# Altium PCB Soil_moisture.PcbDoc
Units mm, origin at the board's own origin, x right, y up, seen from the top; angles counter-clockwise.
Board outline 98 x 100 mm, 2 copper layers (Top Layer, Bottom Layer); 70 components, 10 nets, 185 pads, 240 vias.
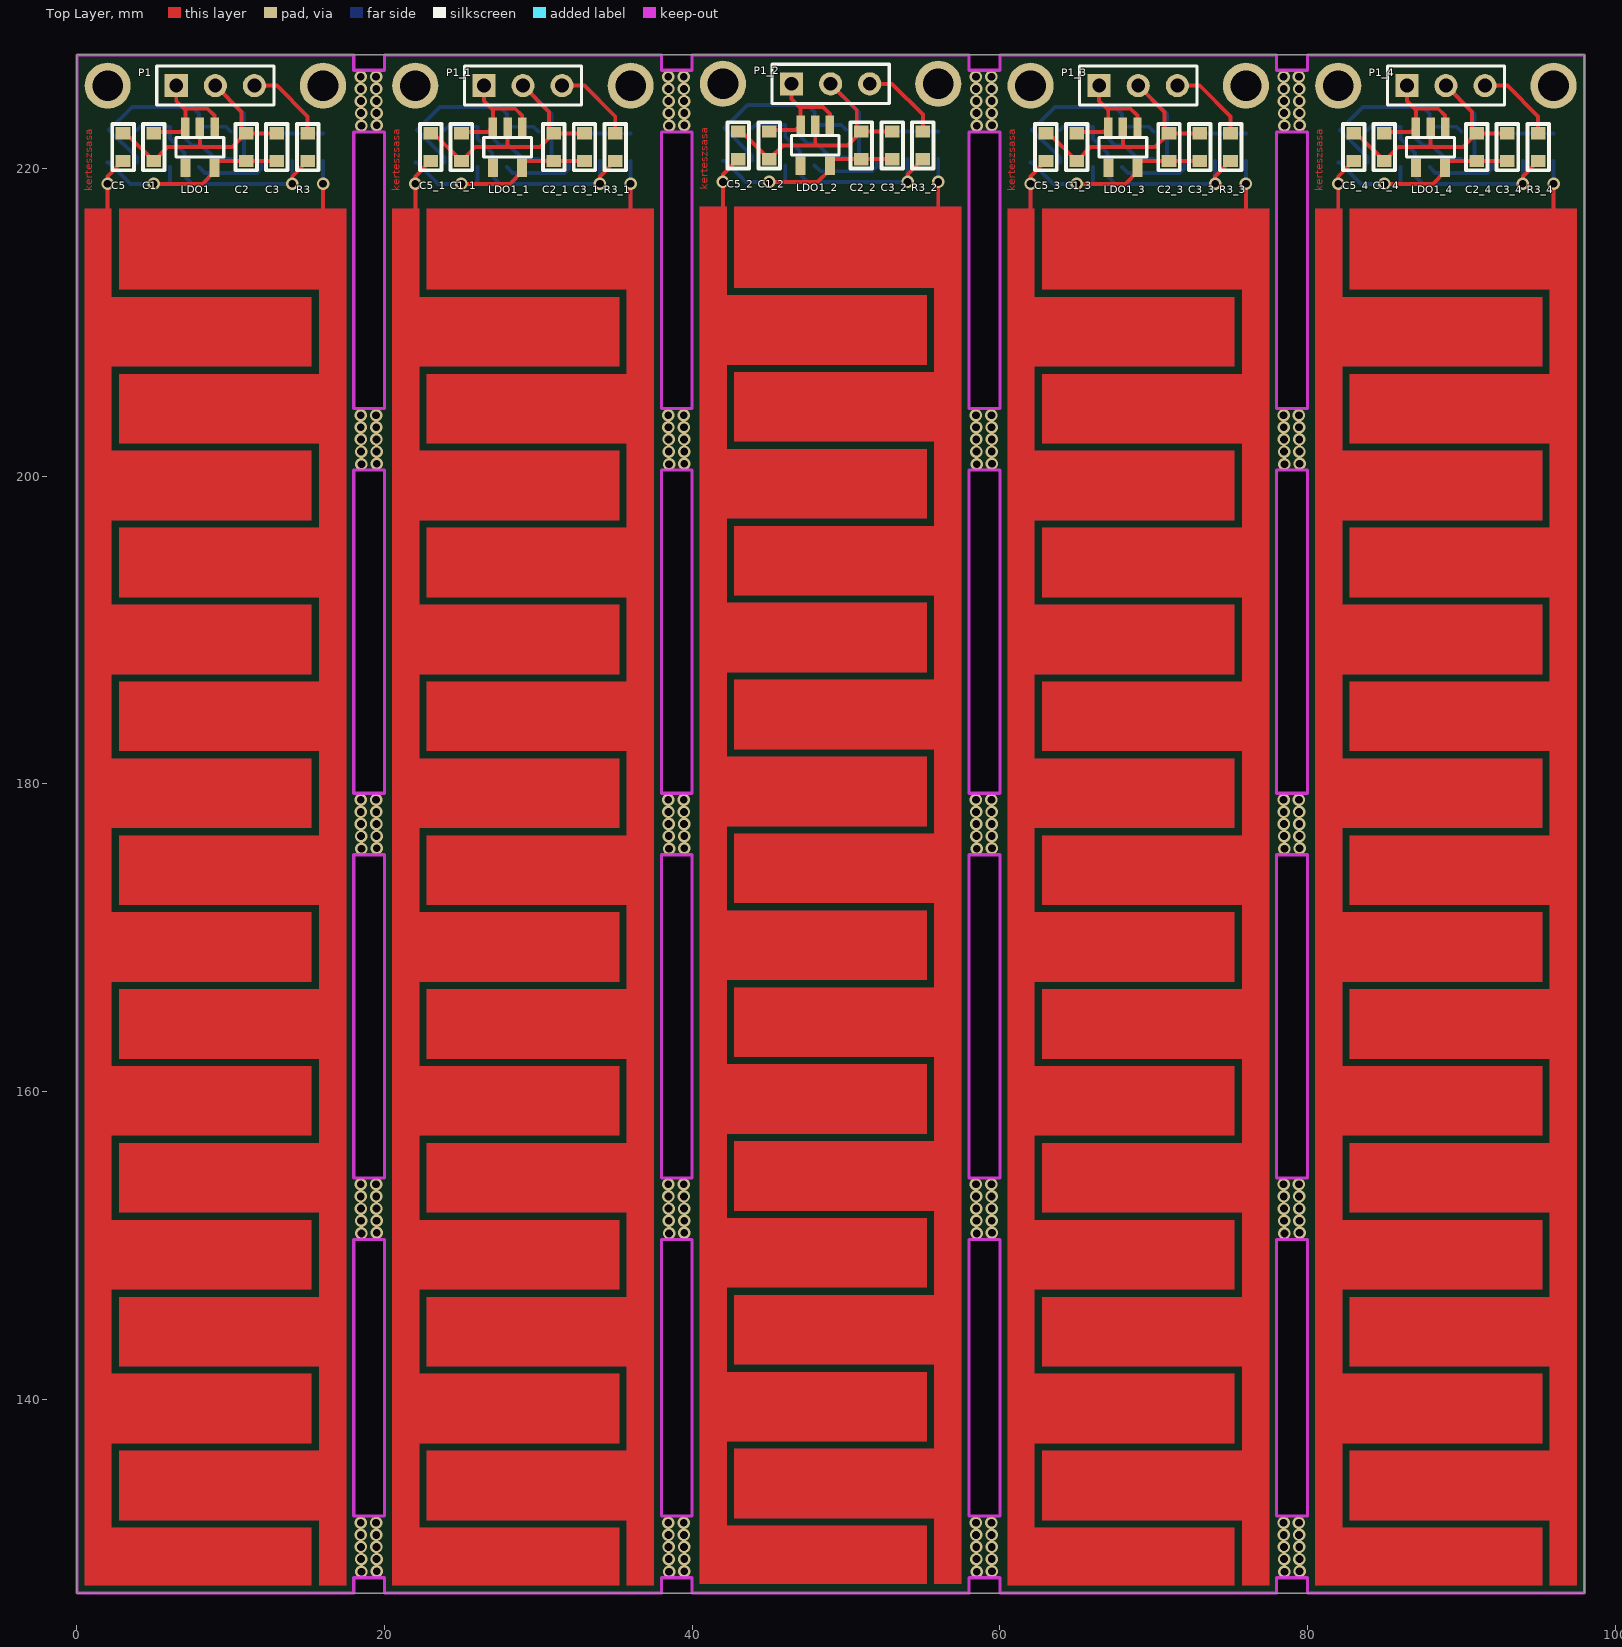
[diagram p0: Top Layer view]
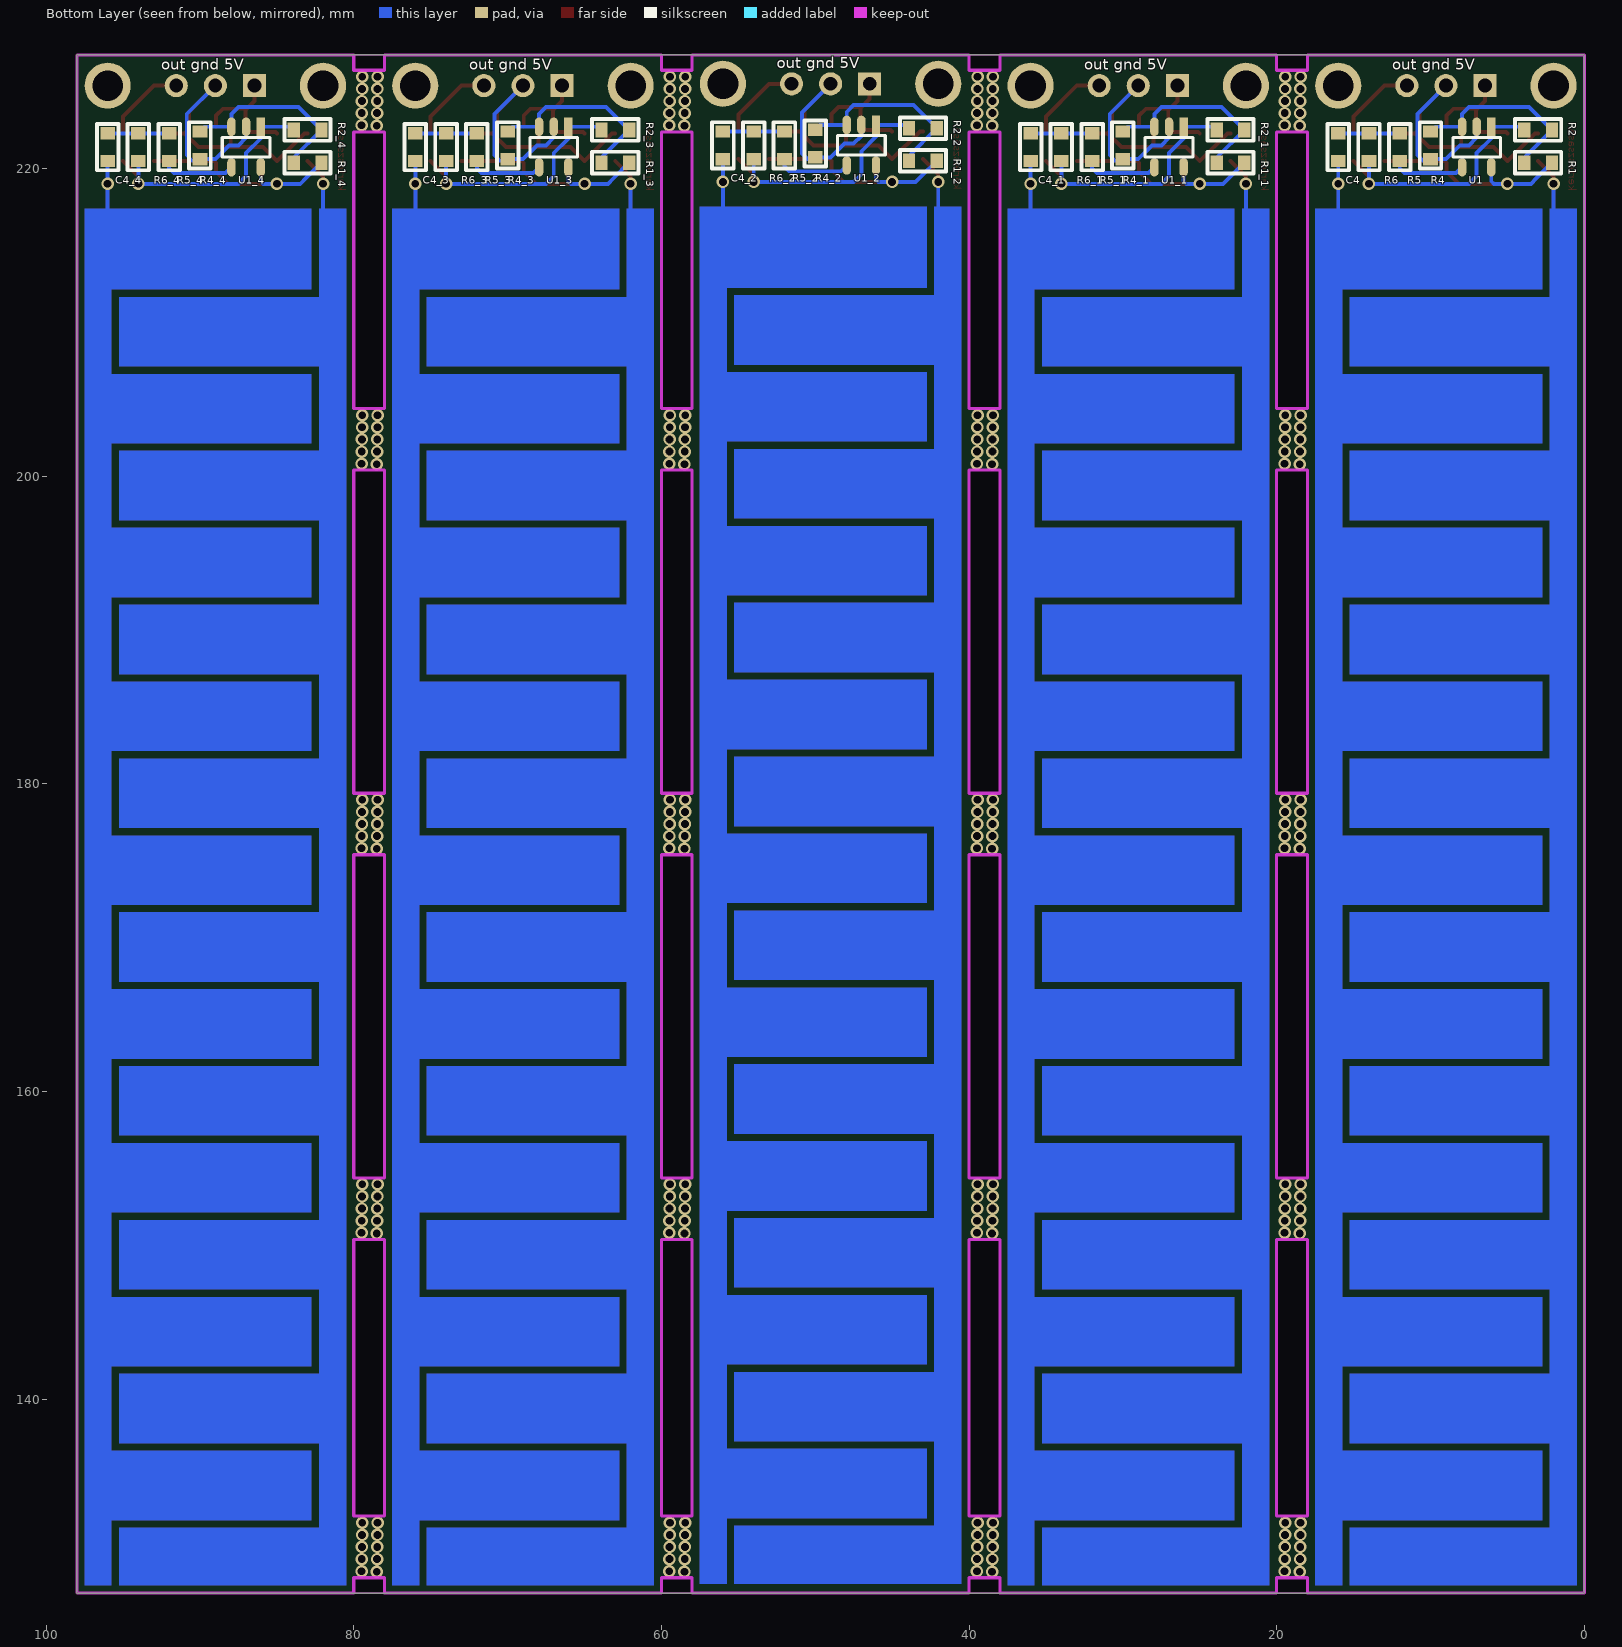
[diagram p1: Bottom Layer view, seen from below]
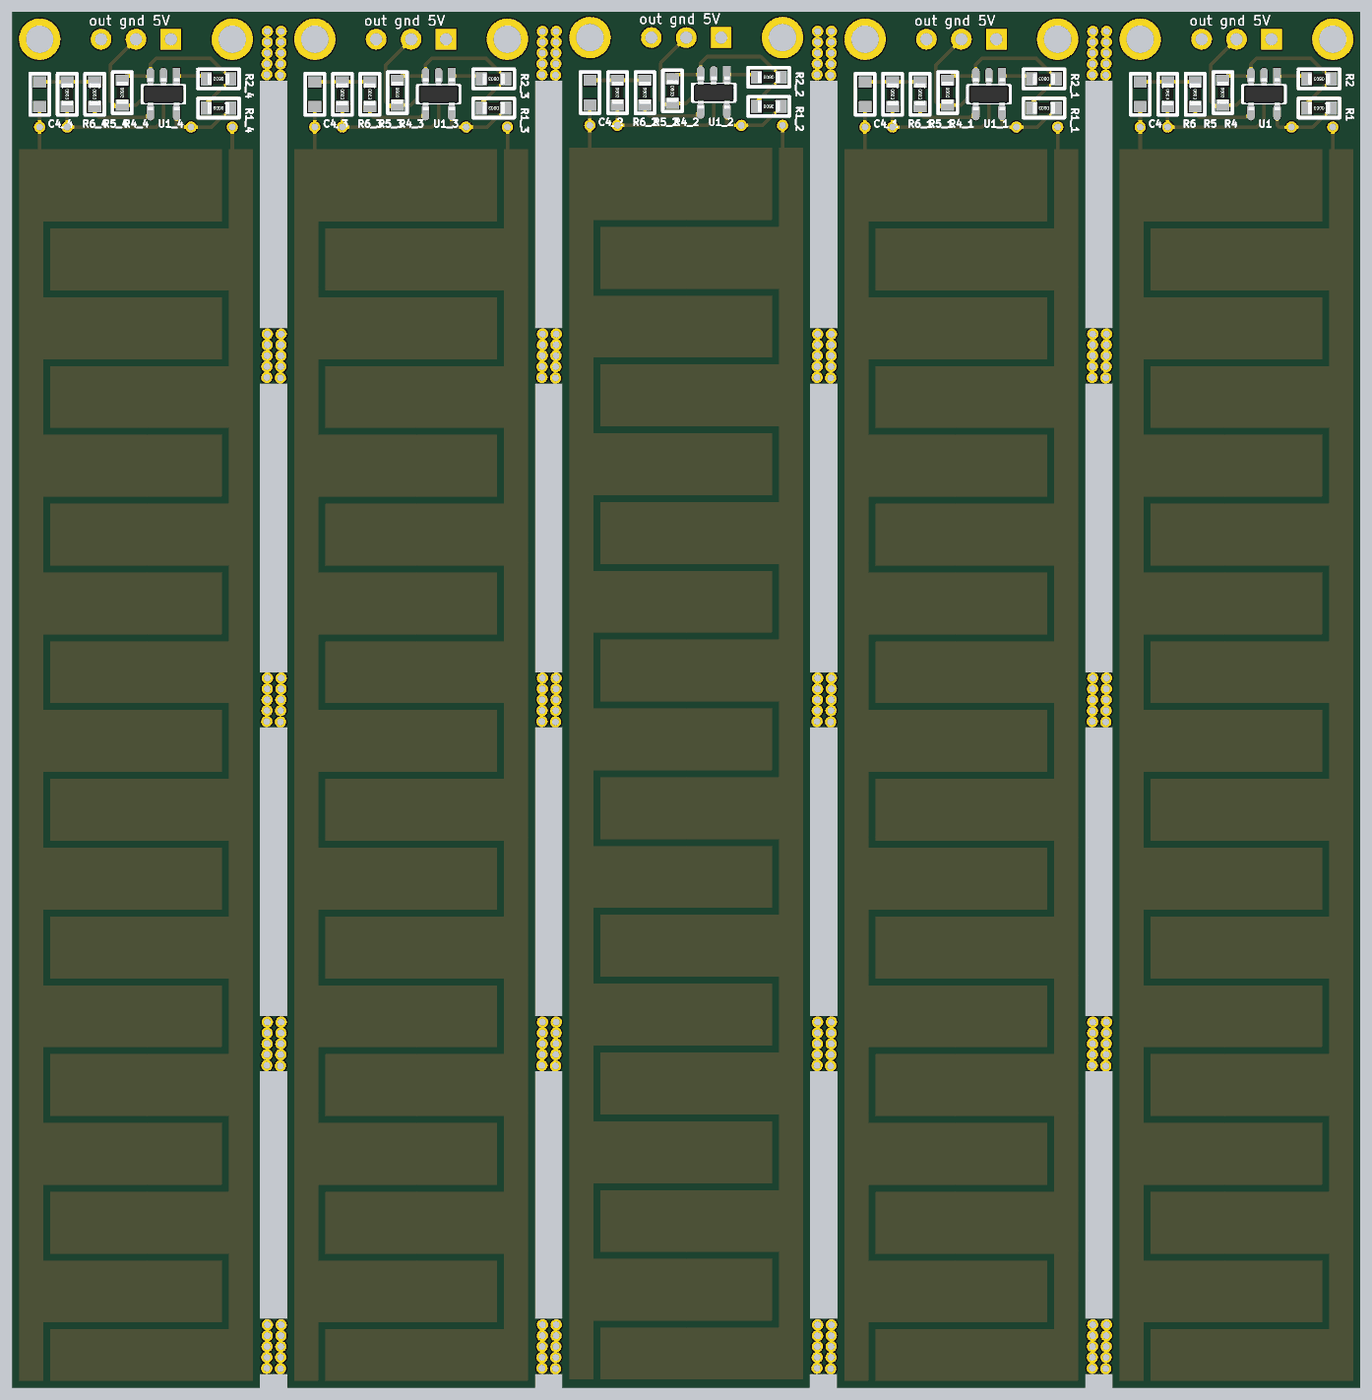
[diagram p2: 3D render of the assembled board from below, using the file's embedded part models]

## Layer stack, top to bottom
Top Layer: signal copper 0.0356
Dielectric: dielectric 0.32, FR-4, Dk 4.8
Bottom Layer: signal copper 0.0356

## Board outline
98,227.381 98,127.381 0,127.381 0,227.381
cut-out: 18,132.381 20,132.381 20,150.381 18,150.381
cut-out: 38,132.381 40,132.381 40,150.381 38,150.381
cut-out: 58,132.381 60,132.381 60,150.381 58,150.381
cut-out: 78,132.381 80,132.381 80,150.381 78,150.381
cut-out: 78,154.381 80,154.381 80,175.381 78,175.381
cut-out: 78,204.381 80,204.381 80,222.381 78,222.381
cut-out: 58,204.381 60,204.381 60,222.381 58,222.381
cut-out: 38,204.381 40,204.381 40,222.381 38,222.381
cut-out: 18,204.381 20,204.381 20,222.381 18,222.381
cut-out: 58,154.381 60,154.381 60,175.381 58,175.381
cut-out: 38,154.381 40,154.381 40,175.381 38,175.381
cut-out: 18,154.381 20,154.381 20,175.381 18,175.381
cut-out: 18,179.381 20,179.381 20,200.381 18,200.381
cut-out: 38,179.381 40,179.381 40,200.381 38,200.381
cut-out: 58,179.381 60,179.381 60,200.381 58,200.381
cut-out: 78,179.381 80,179.381 80,200.381 78,200.381
cut-out: 18,127.381 20,127.381 20,128.381 18,128.381
cut-out: 38.024,127.381 40.024,127.381 40.024,128.381 38.024,128.381
cut-out: 58,127.381 60,127.381 60,128.381 58,128.381
cut-out: 78,127.381 80,127.381 80,128.381 78,128.381
cut-out: 18,226.381 20,226.381 20,227.381 18,227.381
cut-out: 38,226.381 40,226.381 40,227.381 38,227.381
cut-out: 58,226.381 60,226.381 60,227.381 58,227.381
cut-out: 78,226.381 80,226.381 80,227.381 78,227.381

## Design rules (kind name [scope] priority, off if disabled: settings)
Clearance [All] p1: gap=0.254
PolygonConnect [All] p1: connectstyle=Relief reliefconductorwidth=0.254 reliefentries=4 polygonreliefangle="90 Angle"
RoutingVias [All] p1: holewidth=0.711 width=1.27 viastyle="Through Hole" minholewidth=0.508 minwidth=0.813 maxholewidth=0.711 maxwidth=1.27
SilkscreenOverComponentPads [All] p1: minsilkscreentomaskgap=0.254
SolderMaskExpansion [All] p1: expansion=0.102
Width [All] p1: maxlimit=0.254 minlimit=0.254 preferedwidth=0.254
27 further rules are at their usual default settings.

## Classes and differential pairs
component class Soil_moisture: C1 C2 C3 C4 C5 LDO1 P1 R1 R2 R3 R4 R5 R6 U1

## Components (designator, comment, footprint, x,y, rotation, side; value= is the part's Value field where it differs from the comment)
C1 "4.7uF" FP_0603_CAP_080 5,221.381 r90 top
C1_1 "4.7uF" FP_0603_CAP_080 25,221.381 r90 top (schematic designator C1)
C1_2 "4.7uF" FP_0603_CAP_080 45,221.5 r90 top (schematic designator C1)
C1_3 "4.7uF" FP_0603_CAP_080 65,221.381 r90 top (schematic designator C1)
C1_4 "4.7uF" FP_0603_CAP_080 85,221.381 r90 top (schematic designator C1)
C2 "100nF" FP_0603_CAP_080 11,221.381 r270 top
C2_1 "100nF" FP_0603_CAP_080 31,221.381 r270 top (schematic designator C2)
C2_2 "100nF" FP_0603_CAP_080 51,221.5 r270 top (schematic designator C2)
C2_3 "100nF" FP_0603_CAP_080 71,221.381 r270 top (schematic designator C2)
C2_4 "100nF" FP_0603_CAP_080 91,221.381 r270 top (schematic designator C2)
C3 "4.7uF" FP_0603_CAP_080 13,221.381 r270 top
C3_1 "4.7uF" FP_0603_CAP_080 33,221.381 r270 top (schematic designator C3)
C3_2 "4.7uF" FP_0603_CAP_080 53,221.5 r270 top (schematic designator C3)
C3_3 "4.7uF" FP_0603_CAP_080 73,221.381 r270 top (schematic designator C3)
C3_4 "4.7uF" FP_0603_CAP_080 93,221.381 r270 top (schematic designator C3)
C4 "100nF" FP_0603_CAP_080 16,221.381 r90 bottom
C4_1 "100nF" FP_0603_CAP_080 36,221.381 r90 bottom (schematic designator C4)
C4_2 "100nF" FP_0603_CAP_080 56,221.5 r90 bottom (schematic designator C4)
C4_3 "100nF" FP_0603_CAP_080 76,221.381 r90 bottom (schematic designator C4)
C4_4 "100nF" FP_0603_CAP_080 96,221.381 r90 bottom (schematic designator C4)
C5 "100nF" FP_0603_CAP_080 3,221.381 r90 top
C5_1 "100nF" FP_0603_CAP_080 23,221.381 r90 top (schematic designator C5)
C5_2 "100nF" FP_0603_CAP_080 43,221.5 r90 top (schematic designator C5)
C5_3 "100nF" FP_0603_CAP_080 63,221.381 r90 top (schematic designator C5)
C5_4 "100nF" FP_0603_CAP_080 83,221.381 r90 top (schematic designator C5)
LDO1 "LP2980AIM5-3.3" SUPPLY_SOT23-5 8,221.381 r270 top
LDO1_1 "LP2980AIM5-3.3" SUPPLY_SOT23-5 28,221.381 r270 top (schematic designator LDO1)
LDO1_2 "LP2980AIM5-3.3" SUPPLY_SOT23-5 48,221.5 r270 top (schematic designator LDO1)
LDO1_3 "LP2980AIM5-3.3" SUPPLY_SOT23-5 68,221.381 r270 top (schematic designator LDO1)
LDO1_4 "LP2980AIM5-3.3" SUPPLY_SOT23-5 88,221.381 r270 top (schematic designator LDO1)
P1 "Header 3" HDR1X3 6.46,225.381 r0 top
P1_1 "Header 3" HDR1X3 26.46,225.381 r0 top (schematic designator P1)
P1_2 "Header 3" HDR1X3 46.46,225.5 r0 top (schematic designator P1)
P1_3 "Header 3" HDR1X3 66.46,225.381 r0 top (schematic designator P1)
P1_4 "Header 3" HDR1X3 86.46,225.381 r0 top (schematic designator P1)
R1 "75K" FP_0603_RES 3,220.381 r0 bottom
R1_1 "75K" FP_0603_RES 23,220.381 r0 bottom (schematic designator R1)
R1_2 "75K" FP_0603_RES 43,220.5 r0 bottom (schematic designator R1)
R1_3 "75K" FP_0603_RES 63,220.381 r0 bottom (schematic designator R1)
R1_4 "75K" FP_0603_RES 83,220.381 r0 bottom (schematic designator R1)
R2 "220K" FP_0603_RES 3,222.5 r0 bottom
R2_1 "220K" FP_0603_RES 23,222.5 r0 bottom (schematic designator R2)
R2_2 "220K" FP_0603_RES 43,222.619 r0 bottom (schematic designator R2)
R2_3 "220K" FP_0603_RES 63,222.5 r0 bottom (schematic designator R2)
R2_4 "220K" FP_0603_RES 83,222.5 r0 bottom (schematic designator R2)
R3 "1K" FP_0603_RES 15,221.381 r90 top
R3_1 "1K" FP_0603_RES 35,221.381 r90 top (schematic designator R3)
R3_2 "1K" FP_0603_RES 55,221.5 r90 top (schematic designator R3)
R3_3 "1K" FP_0603_RES 75,221.381 r90 top (schematic designator R3)
R3_4 "1K" FP_0603_RES 95,221.381 r90 top (schematic designator R3)
R4 "75K" FP_0603_RES 10,221.5 r270 bottom
R4_1 "75K" FP_0603_RES 30,221.5 r270 bottom (schematic designator R4)
R4_2 "75K" FP_0603_RES 50,221.619 r270 bottom (schematic designator R4)
R4_3 "75K" FP_0603_RES 70,221.5 r270 bottom (schematic designator R4)
R4_4 "75K" FP_0603_RES 90,221.5 r270 bottom (schematic designator R4)
R5 "1K" FP_0603_RES 12,221.381 r270 bottom
R5_1 "1K" FP_0603_RES 32,221.381 r270 bottom (schematic designator R5)
R5_2 "1K" FP_0603_RES 52,221.5 r270 bottom (schematic designator R5)
R5_3 "1K" FP_0603_RES 72,221.381 r270 bottom (schematic designator R5)
R5_4 "1K" FP_0603_RES 92,221.381 r270 bottom (schematic designator R5)
R6 "75K" FP_0603_RES 14,221.381 r270 bottom
R6_1 "75K" FP_0603_RES 34,221.381 r270 bottom (schematic designator R6)
R6_2 "75K" FP_0603_RES 54,221.5 r270 bottom (schematic designator R6)
R6_3 "75K" FP_0603_RES 74,221.381 r270 bottom (schematic designator R6)
R6_4 "75K" FP_0603_RES 94,221.381 r270 bottom (schematic designator R6)
U1 "MCP6001" ANALOG_SOT23-5 7,221.381 r270 bottom
U1_1 "MCP6001" ANALOG_SOT23-5 27,221.381 r270 bottom (schematic designator U1)
U1_2 "MCP6001" ANALOG_SOT23-5 47,221.5 r270 bottom (schematic designator U1)
U1_3 "MCP6001" ANALOG_SOT23-5 67,221.381 r270 bottom (schematic designator U1)
U1_4 "MCP6001" ANALOG_SOT23-5 87,221.381 r270 bottom (schematic designator U1)

## Footprints (in the part's own frame and the unit in brackets; to place one, negate y for a bottom-side part, rotate by r counter-clockwise, add the part's x,y. Pads: shape width x height; smd on the part's side, far side on the other; paste and mask are expansions set on the pad)
ANALOG_SOT23-5 [mm] "SOT23, 5-Leads, Body 2.9x1.6mm, Pitch 0.95mm, Lead Span 2.8mm, IPC Medium Density"
  rect 1.2x0.55 smd mask+0.05: 1(-1.327,0.95)
  oval 1.2x0.55 smd mask+0.05: 2(-1.327,0) 3(-1.327,-0.95) 4(1.3,-0.95) 5(1.3,0.95)
  silkscreen extent -0.64,-1.55 0.64,1.55, body extent -1.17,-1.46 1.17,1.46, height 1
FP_0603_CAP_080 [mm] "0.8mm magas 0603 kapacitás"
  rect 0.8x0.95 smd: 1(-0.9,0) 2(0.9,0)
  silkscreen extent -1.5,-0.7 1.5,0.7, body extent -0.8,-0.4 0.76,0.4, height 0.8
FP_0603_RES [mm] "0603 ellenállás"
  rect 0.8x0.95 smd: 1(-0.9,0) 2(0.9,0)
  silkscreen extent -1.5,-0.7 1.5,0.7, body extent -0.8,-0.4 0.8,0.4, height 0.44
HDR1X3 [mm] "Connector; Header; 3 Position"
  rect 1.5x1.5 hole 0.9: 1(0,0)
  round 1.5 hole 0.9: 2(2.54,0) 3(5.08,0)
  silkscreen extent -1.27,-1.27 6.35,1.27
SUPPLY_SOT23-5 [mm] "SOT23, 5-Leads, Body 2.9x1.6mm, Pitch 0.95mm, Lead Span 2.8mm, IPC Medium Density"
  rect 1.2x0.55 smd mask+0.05: 1(-1.327,0.95) 2(-1.327,0) 3(-1.327,-0.95)
  rect 1.2x0.65 smd: 4(1.327,-0.95) 5(1.327,0.95)
  silkscreen extent -0.64,-1.55 0.64,1.55, body extent -1.17,-1.46 1.17,1.46, height 1

## Part data
C1 C1_1 C1_2 C1_3 C1_4 C2 C2_1 C2_2 C2_3 C2_4 C3 C3_1 C3_2 C3_3 C3_4 C4 C4_1 C4_2 C4_3 C4_4 C5 C5_1 C5_2 C5_3 C5_4: library part Cap, "Capacitor"
LDO1 LDO1_1 LDO1_2 LDO1_3 LDO1_4: library part LP2980IM5-3.8, "Micropower 50 mA Ultra Low-Dropout Regulator In SOT-23 and micro SMD Packages"
P1 P1_1 P1_2 P1_3 P1_4: "Header, 3-Pin"
R1 R1_1 R1_2 R1_3 R1_4 R2 R2_1 R2_2 R2_3 R2_4 R3 R3_1 R3_2 R3_3 R3_4 R4 R4_1 R4_2 R4_3 R4_4 R5 R5_1 R5_2 R5_3 R5_4 R6 R6_1 R6_2 R6_3 R6_4: library part Res3, "Resistor"

## Free pads (board coordinates)
  round 3 hole 2: 0(2,225.381) 0(16,225.381) 0(22,225.381) 0(36,225.381) 0(42,225.5) 0(56,225.5) 0(62,225.381) 0(76,225.381) 0(82,225.381) 0(96,225.381)

## Via types
v1: diameter 0.813, hole 0.508, Top Layer to Bottom Layer, 240 vias

## Nets (pads, with @x,y where several pads share a name; then routed paths per layer and width w, separated by ;. In a path a pad name is that pad's centre, name@x,y a point inside that pad or via, vN(x,y) a via of type N, cw(c..) or ccw(c..) an arc to the next point about the centre after c; other vN are vias at no path point)
3V3: C2.2 C3.2 LDO1.5 R1.1 U1.5 | length 14.6
  Top Layer w0.254: v1(5,219) 8.157,219 8.95,219.793 LDO1.5 8.95,220.364 9.067,220.481 C2.2 C3.2
  Bottom Layer w0.254: R1.1@2,220.381 R1.1 3.1,219.381 3.481,219 3.48,218.999 5.88,218.999 6.05,219.169 U1.5
5V: C1.2 LDO1.1 LDO1.3 P1.1 | length 8
  Top Layer w0.254: C1.2 5.1,222.381 6.723,222.381 LDO1.3 7.05,223.791 6.46,224.381 P1.1 ; 7.05,223.881 8.5,223.881 8.95,223.431 LDO1.1
FREQ_OUT: P1.3 R3.2 | length 5.4
  Top Layer w0.254: P1.3 13,225.381 15,223.381 R3.2
GND: C1.1 C2.1 C3.1 C5.2 LDO1.2 P1.2 R4.2 U1.2 | length 26.8
  Top Layer w0.254: C5.2 3.2,222.281 C1.1 5.9,221.381 8,221.381 ; LDO1.2 8,221.381 ; P1.2 10.7,223.681 10.7,222.581 C2.1 ; C3.1 C2.1 ; 8,221.381 10.1,221.381 C2.1
  Bottom Layer w0.254: U1.2 7,222 7.5,221.5 8.1,221.5 9,220.6 R4.2 ; P1.2 10.856,223.525 10.856,220.856 10.5,220.5
GND_ESD: C5.1 | length 6
  Top Layer w0.254: 1.75,216.881 2,217.131 v1(2,219) 2,219.481 C5.1
  Bottom Layer w0.254: 2,217.131 v1(2,219)
I+: R1.2 R2.1 R4.1 U1.3 | length 12.5
  Bottom Layer w0.254: R1.2 3.9,220.7 R2.1 3.6,224 7.5,224 7.95,223.55 U1.3 9.692,222.708 R4.1
I-: R5.2 U1.4 | length 4.8
  Bottom Layer w0.254: U1.4 8.331,219.7 11.7,219.7 12,220 R5.2
MES: C4.1 | length 5.7
  Top Layer w0.254: 16,217.131 v1(16,219)
  Bottom Layer w0.254: 16,216.631 v1(16,219) C4.1
NetC4_2: C4.2 R5.1 R6.1 | length 4
  Bottom Layer w0.254: R5.1 R6.1 C4.2
O: R2.2 R3.1 R6.2 U1.1 | length 16.5
  Top Layer w0.254: v1(14,219) 14,219.481 R3.1
  Bottom Layer w0.254: R2.2 4.108,222.708 U1.1 ; U1.1@6,222.658 U1.1 ; R6.2 v1(14,219) 7.5,219 7,219.5 7,221 6.05,221.95 U1.1
pads on no net: C1_1.1 C1_1.2 C1_2.1 C1_2.2 C1_3.1 C1_3.2 C1_4.1 C1_4.2 C2_1.1 C2_1.2 C2_2.1 C2_2.2 C2_3.1 C2_3.2 C2_4.1 C2_4.2 C3_1.1 C3_1.2 C3_2.1 C3_2.2 C3_3.1 C3_3.2 C3_4.1 C3_4.2 C4_1.1 C4_1.2 C4_2.1 C4_2.2 C4_3.1 C4_3.2 C4_4.1 C4_4.2 C5_1.1 C5_1.2 C5_2.1 C5_2.2 C5_3.1 C5_3.2 C5_4.1 C5_4.2 LDO1.4 LDO1_1.1 LDO1_1.2 LDO1_1.3 LDO1_1.4 LDO1_1.5 LDO1_2.1 LDO1_2.2 LDO1_2.3 LDO1_2.4 LDO1_2.5 LDO1_3.1 LDO1_3.2 LDO1_3.3 LDO1_3.4 LDO1_3.5 LDO1_4.1 LDO1_4.2 LDO1_4.3 LDO1_4.4 LDO1_4.5 P1_1.1 P1_1.2 P1_1.3 P1_2.1 P1_2.2 P1_2.3 P1_3.1 P1_3.2 P1_3.3 P1_4.1 P1_4.2 P1_4.3 R1_1.1 R1_1.2 R1_2.1 R1_2.2 R1_3.1 R1_3.2 R1_4.1 R1_4.2 R2_1.1 R2_1.2 R2_2.1 R2_2.2 R2_3.1 R2_3.2 R2_4.1 R2_4.2 R3_1.1 R3_1.2 R3_2.1 R3_2.2 R3_3.1 R3_3.2 R3_4.1 R3_4.2 R4_1.1 R4_1.2 R4_2.1 R4_2.2 R4_3.1 R4_3.2 R4_4.1 R4_4.2 R5_1.1 R5_1.2 R5_2.1 R5_2.2 R5_3.1 R5_3.2 R5_4.1 R5_4.2 R6_1.1 R6_1.2 R6_2.1 R6_2.2 R6_3.1 R6_3.2 R6_4.1 R6_4.2 U1_1.1 U1_1.2 U1_1.3 U1_1.4 U1_1.5 U1_2.1 U1_2.2 U1_2.3 U1_2.4 U1_2.5 U1_3.1 U1_3.2 U1_3.3 U1_3.4 U1_3.5 U1_4.1 U1_4.2 U1_4.3 U1_4.4 U1_4.5
copper on no net: | length 417.1
  Top Layer w0.254: 21.75,216.881 22,217.131 v1(22,219) 22,219.481 23,220.481 ; 23,222.281 23.2,222.281 25,220.481 25.9,221.381 28,221.381 ; v1(25,219) 28.157,219 28.95,219.793 28.95,220.054 28.95,220.364 29.067,220.481 31,220.481 33,220.481 ; 25,222.281 25.1,222.381 26.723,222.381 27.05,222.708 27.05,223.791 26.46,224.381 26.46,225.381 ; 27.05,223.881 28.5,223.881 28.95,223.431 28.95,222.708 ; 28,222.708 28,221.381 ; 29,225.381 30.7,223.681 30.7,222.581 31,222.281 ; 31.54,225.381 33,225.381 35,223.381 35,222.281 ; 33,222.281 31,222.281 ; v1(34,219) 34,219.481 35,220.481 ; 36,217.131 v1(36,219) ; 41.75,217 42,217.25 v1(42,219.119) 42,219.6 43,220.6 ; 43,222.4 43.2,222.4 45,220.6 45.9,221.5 48,221.5 ; v1(45,219.119) 48.157,219.119 48.95,219.912 48.95,220.173 48.95,220.483 49.067,220.6 51,220.6 53,220.6 ; 45,222.4 45.1,222.5 46.723,222.5 47.05,222.827 47.05,223.91 46.46,224.5 46.46,225.5 ; 47.05,224 48.5,224 48.95,223.55 48.95,222.827 ; 48,222.827 48,221.5 ; 49,225.5 50.7,223.8 50.7,222.7 51,222.4 ; 51.54,225.5 53,225.5 55,223.5 55,222.4 ; 53,222.4 51,222.4 ; v1(54,219.119) 54,219.6 55,220.6 ; 56,217.25 v1(56,219.119) ; 61.75,216.881 62,217.131 v1(62,219) 62,219.481 63,220.481 ; 63,222.281 63.2,222.281 65,220.481 65.9,221.381 68,221.381 ; v1(65,219) 68.157,219 68.95,219.793 68.95,220.054 68.95,220.364 69.067,220.481 71,220.481 73,220.481 ; 65,222.281 65.1,222.381 66.723,222.381 67.05,222.708 67.05,223.791 66.46,224.381 66.46,225.381 ; 67.05,223.881 68.5,223.881 68.95,223.431 68.95,222.708 ; 68,222.708 68,221.381 ; 69,225.381 70.7,223.681 70.7,222.581 71,222.281 ; 71.54,225.381 73,225.381 75,223.381 75,222.281 ; 73,222.281 71,222.281 ; v1(74,219) 74,219.481 75,220.481 ; 76,217.131 v1(76,219) ; 81.75,216.881 82,217.131 v1(82,219) 82,219.481 83,220.481 ; 83,222.281 83.2,222.281 85,220.481 85.9,221.381 88,221.381 ; v1(85,219) 88.157,219 88.95,219.793 88.95,220.054 88.95,220.364 89.067,220.481 91,220.481 93,220.481 ; 85,222.281 85.1,222.381 86.723,222.381 87.05,222.708 87.05,223.791 86.46,224.381 86.46,225.381 ; 87.05,223.881 88.5,223.881 88.95,223.431 88.95,222.708 ; 88,222.708 88,221.381 ; 89,225.381 90.7,223.681 90.7,222.581 91,222.281 ; 91.54,225.381 93,225.381 95,223.381 95,222.281 ; 93,222.281 91,222.281 ; v1(94,219) 94,219.481 95,220.481 ; 96,217.131 v1(96,219) ; 28,221.381 30.1,221.381 31,222.281 ; 48,221.5 50.1,221.5 51,222.4 ; 68,221.381 70.1,221.381 71,222.281 ; 88,221.381 90.1,221.381 91,222.281
  Bottom Layer w0.254: 22,217.131 v1(22,219) ; 22,220.381 22.1,220.381 23.1,219.381 23.481,219 23.48,218.999 25.88,218.999 26.05,219.169 26.05,220.081 ; 23.9,220.381 23.9,220.7 22.1,222.5 23.6,224 27.5,224 27.95,223.55 27.95,222.708 29.692,222.708 30,222.4 ; 23.9,222.5 24.108,222.708 26.05,222.708 ; 26,222.658 26.05,222.708 ; 27,222.708 27,222 27.5,221.5 28.1,221.5 29,220.6 30,220.6 ; 27.95,220.081 28.331,219.7 31.7,219.7 32,220 32,220.481 ; 29,225.381 30.856,223.525 30.856,220.856 30.5,220.5 ; 32,222.281 34,222.281 36,222.281 ; 34,220.481 v1(34,219) 27.5,219 27,219.5 27,221 26.05,221.95 26.05,222.708 ; 36,216.631 v1(36,219) 36,220.481 ; 42,217.25 v1(42,219.119) ; 42,220.5 42.1,220.5 43.1,219.5 43.481,219.119 43.48,219.118 45.88,219.118 46.05,219.288 46.05,220.2 ; 43.9,220.5 43.9,220.819 42.1,222.619 43.6,224.119 47.5,224.119 47.95,223.669 47.95,222.827 49.692,222.827 50,222.519 ; 43.9,222.619 44.108,222.827 46.05,222.827 ; 46,222.777 46.05,222.827 ; 47,222.827 47,222.119 47.5,221.619 48.1,221.619 49,220.719 50,220.719 ; 47.95,220.2 48.331,219.819 51.7,219.819 52,220.119 52,220.6 ; 49,225.5 50.856,223.644 50.856,220.975 50.5,220.619 ; 52,222.4 54,222.4 56,222.4 ; 54,220.6 v1(54,219.119) 47.5,219.119 47,219.619 47,221.119 46.05,222.069 46.05,222.827 ; 56,216.75 v1(56,219.119) 56,220.6 ; 62,217.131 v1(62,219) ; 62,220.381 62.1,220.381 63.1,219.381 63.481,219 63.48,218.999 65.88,218.999 66.05,219.169 66.05,220.081 ; 63.9,220.381 63.9,220.7 62.1,222.5 63.6,224 67.5,224 67.95,223.55 67.95,222.708 69.692,222.708 70,222.4 ; 63.9,222.5 64.108,222.708 66.05,222.708 ; 66,222.658 66.05,222.708 ; 67,222.708 67,222 67.5,221.5 68.1,221.5 69,220.6 70,220.6 ; 67.95,220.081 68.331,219.7 71.7,219.7 72,220 72,220.481 ; 69,225.381 70.856,223.525 70.856,220.856 70.5,220.5 ; 72,222.281 74,222.281 76,222.281 ; 74,220.481 v1(74,219) 67.5,219 67,219.5 67,221 66.05,221.95 66.05,222.708 ; 76,216.631 v1(76,219) 76,220.481 ; 82,217.131 v1(82,219) ; 82,220.381 82.1,220.381 83.1,219.381 83.481,219 83.48,218.999 85.88,218.999 86.05,219.169 86.05,220.081 ; 83.9,220.381 83.9,220.7 82.1,222.5 83.6,224 87.5,224 87.95,223.55 87.95,222.708 89.692,222.708 90,222.4 ; 83.9,222.5 84.108,222.708 86.05,222.708 ; 86,222.658 86.05,222.708 ; 87,222.708 87,222 87.5,221.5 88.1,221.5 89,220.6 90,220.6 ; 87.95,220.081 88.331,219.7 91.7,219.7 92,220 92,220.481 ; 89,225.381 90.856,223.525 90.856,220.856 90.5,220.5 ; 92,222.281 94,222.281 96,222.281 ; 94,220.481 v1(94,219) 87.5,219 87,219.5 87,221 86.05,221.95 86.05,222.708 ; 96,216.631 v1(96,219) 96,220.481
  other v1: 18.5,128.769 18.5,128.769 38.5,128.769 38.5,128.769 58.5,128.769 78.5,128.769 19.49,128.806 19.49,128.806 39.49,128.806 39.49,128.806 59.49,128.806 79.49,128.806 18.48,129.594 18.48,129.594 19.48,129.594 19.48,129.594 38.48,129.594 38.48,129.594 39.48,129.594 39.48,129.594 58.48,129.594 59.48,129.594 78.48,129.594 79.48,129.594 18.469,130.381 18.469,130.381 19.469,130.381 19.469,130.381 38.469,130.381 38.469,130.381 39.469,130.381 39.469,130.381 58.469,130.381 59.469,130.381 78.469,130.381 79.469,130.381 18.459,131.168 18.459,131.168 19.459,131.168 19.459,131.168 38.459,131.168 38.459,131.168 39.459,131.168 39.459,131.168 58.459,131.168 59.459,131.168 78.459,131.168 79.459,131.168 18.449,131.956 18.449,131.956 19.449,131.956 19.449,131.956 38.449,131.956 38.449,131.956 39.449,131.956 39.449,131.956 58.449,131.956 59.449,131.956 78.449,131.956 79.449,131.956 18.5,150.769 38.5,150.769 58.5,150.769 78.5,150.769 19.49,150.806 39.49,150.806 59.49,150.806 79.49,150.806 18.48,151.594 19.48,151.594 38.48,151.594 39.48,151.594 58.48,151.594 59.48,151.594 78.48,151.594 79.48,151.594 18.469,152.381 19.469,152.381 38.469,152.381 39.469,152.381 58.469,152.381 59.469,152.381 78.469,152.381 79.469,152.381 18.459,153.168 19.459,153.168 38.459,153.168 39.459,153.168 58.459,153.168 59.459,153.168 78.459,153.168 79.459,153.168 18.449,153.956 19.449,153.956 38.449,153.956 39.449,153.956 58.449,153.956 59.449,153.956 78.449,153.956 79.449,153.956 18.5,175.769 38.5,175.769 58.5,175.769 78.5,175.769 19.49,175.806 39.49,175.806 59.49,175.806 79.49,175.806 18.48,176.594 19.48,176.594 38.48,176.594 39.48,176.594 58.48,176.594 59.48,176.594 78.48,176.594 79.48,176.594 18.469,177.381 19.469,177.381 38.469,177.381 39.469,177.381 58.469,177.381 59.469,177.381 78.469,177.381 79.469,177.381 18.459,178.168 19.459,178.168 38.459,178.168 39.459,178.168 58.459,178.168 59.459,178.168 78.459,178.168 79.459,178.168 18.449,178.956 19.449,178.956 38.449,178.956 39.449,178.956 58.449,178.956 59.449,178.956 78.449,178.956 79.449,178.956 18.5,200.769 38.5,200.769 58.5,200.769 78.5,200.769 19.49,200.806 39.49,200.806 59.49,200.806 79.49,200.806 18.48,201.594 19.48,201.594 38.48,201.594 39.48,201.594 58.48,201.594 59.48,201.594 78.48,201.594 79.48,201.594 18.469,202.381 19.469,202.381 38.469,202.381 39.469,202.381 58.469,202.381 59.469,202.381 78.469,202.381 79.469,202.381 18.459,203.168 19.459,203.168 38.459,203.168 39.459,203.168 58.459,203.168 59.459,203.168 78.459,203.168 79.459,203.168 18.449,203.956 19.449,203.956 38.449,203.956 39.449,203.956 58.449,203.956 59.449,203.956 78.449,203.956 79.449,203.956 18.5,222.769 38.5,222.769 58.5,222.769 78.5,222.769 19.49,222.806 39.49,222.806 59.49,222.806 79.49,222.806 18.48,223.594 19.48,223.594 38.48,223.594 39.48,223.594 58.48,223.594 59.48,223.594 78.48,223.594 79.48,223.594 18.469,224.381 19.469,224.381 38.469,224.381 39.469,224.381 58.469,224.381 59.469,224.381 78.469,224.381 79.469,224.381 18.459,225.168 19.459,225.168 38.459,225.168 39.459,225.168 58.459,225.168 59.459,225.168 78.459,225.168 79.459,225.168 18.449,225.956 19.449,225.956 38.449,225.956 39.449,225.956 58.449,225.956 59.449,225.956 78.449,225.956 79.449,225.956

## Keep-outs
Keep-Out Layer:
  lines w0.2: 18,127.381 18,128.381 20,128.381 20,127.381 ; 18.024,127.381 0,127.381 0,227.381 18,227.381 18,226.381 20,226.381 20,227.381 38,227.381 38,226.381 40,226.381 40,227.381 58,227.381 58,226.381 60,226.381 60,227.381 78,227.381 78,226.381 80,226.381 80,227.381 98,227.381 98,127.381 80.024,127.381 ; 20.024,127.381 38.024,127.381 ; 38,127.381 38,128.381 40,128.381 40,127.381 ; 40.024,127.381 58.024,127.381 ; 58,127.381 58,128.381 60,128.381 60,127.381 ; 60.024,127.381 78.024,127.381 ; 78,127.381 78,128.381 80,128.381 80,127.381 ; 18,132.381 20,132.381 20,150.381 18,150.381 18,132.381 ; 18,154.381 18,175.381 20,175.381 20,154.381 18,154.381 ; 18,179.381 20,179.381 20,200.381 18,200.381 18,179.381 ; 18,204.381 20,204.381 20,222.381 18,222.381 18,204.381 ; 38,132.381 40,132.381 40,150.381 38,150.381 38,132.381 ; 38,154.381 38,175.381 40,175.381 40,154.381 38,154.381 ; 38,179.381 40,179.381 40,200.381 38,200.381 38,179.381 ; 38,204.381 40,204.381 40,222.381 38,222.381 38,204.381 ; 58,132.381 60,132.381 60,150.381 58,150.381 58,132.381 ; 58,154.381 58,175.381 60,175.381 60,154.381 58,154.381 ; 58,179.381 60,179.381 60,200.381 58,200.381 58,179.381 ; 58,204.381 60,204.381 60,222.381 58,222.381 58,204.381 ; 78,132.381 80,132.381 80,150.381 78,150.381 78,132.381 ; 78,154.381 78,175.381 80,175.381 80,154.381 78,154.381 ; 78,179.381 80,179.381 80,200.381 78,200.381 78,179.381 ; 78,204.381 80,204.381 80,222.381 78,222.381 78,204.381

## Other copper
Top Layer:
  region: 80.5,127.881 95.25,127.881 95.25,131.631 82.25,131.631 82.25,137.131 95.25,137.131 95.25,141.631 82.25,141.631 82.25,147.131 95.25,147.131 95.25,151.631 82.25,151.631 82.25,157.131 95.25,157.131 95.25,161.631 82.25,161.631 82.25,167.131 95.25,167.131 95.25,171.631 82.25,171.631 82.25,177.131 95.25,177.131 95.25,181.631 82.25,181.631 82.25,187.131 95.25,187.131 95.25,191.631 82.25,191.631 82.25,197.131 95.25,197.131 95.25,201.631 82.25,201.631 82.25,207.131 95.25,207.131 95.25,211.631 82.25,211.631 82.25,217.381 80.5,217.381
  region: 97.5,217.381 82.75,217.381 82.75,212.131 95.75,212.131 95.75,206.631 82.75,206.631 82.75,202.131 95.75,202.131 95.75,196.631 82.75,196.631 82.75,192.131 95.75,192.131 95.75,186.631 82.75,186.631 82.75,182.131 95.75,182.131 95.75,176.631 82.75,176.631 82.75,172.131 95.75,172.131 95.75,166.631 82.75,166.631 82.75,162.131 95.75,162.131 95.75,156.631 82.75,156.631 82.75,152.131 95.75,152.131 95.75,146.631 82.75,146.631 82.75,142.131 95.75,142.131 95.75,136.631 82.75,136.631 82.75,132.131 95.75,132.131 95.75,127.881 97.5,127.881
  region: 60.5,127.881 75.25,127.881 75.25,131.631 62.25,131.631 62.25,137.131 75.25,137.131 75.25,141.631 62.25,141.631 62.25,147.131 75.25,147.131 75.25,151.631 62.25,151.631 62.25,157.131 75.25,157.131 75.25,161.631 62.25,161.631 62.25,167.131 75.25,167.131 75.25,171.631 62.25,171.631 62.25,177.131 75.25,177.131 75.25,181.631 62.25,181.631 62.25,187.131 75.25,187.131 75.25,191.631 62.25,191.631 62.25,197.131 75.25,197.131 75.25,201.631 62.25,201.631 62.25,207.131 75.25,207.131 75.25,211.631 62.25,211.631 62.25,217.381 60.5,217.381
  region: 77.5,217.381 62.75,217.381 62.75,212.131 75.75,212.131 75.75,206.631 62.75,206.631 62.75,202.131 75.75,202.131 75.75,196.631 62.75,196.631 62.75,192.131 75.75,192.131 75.75,186.631 62.75,186.631 62.75,182.131 75.75,182.131 75.75,176.631 62.75,176.631 62.75,172.131 75.75,172.131 75.75,166.631 62.75,166.631 62.75,162.131 75.75,162.131 75.75,156.631 62.75,156.631 62.75,152.131 75.75,152.131 75.75,146.631 62.75,146.631 62.75,142.131 75.75,142.131 75.75,136.631 62.75,136.631 62.75,132.131 75.75,132.131 75.75,127.881 77.5,127.881
  region: 40.5,128 55.25,128 55.25,131.75 42.25,131.75 42.25,137.25 55.25,137.25 55.25,141.75 42.25,141.75 42.25,147.25 55.25,147.25 55.25,151.75 42.25,151.75 42.25,157.25 55.25,157.25 55.25,161.75 42.25,161.75 42.25,167.25 55.25,167.25 55.25,171.75 42.25,171.75 42.25,177.25 55.25,177.25 55.25,181.75 42.25,181.75 42.25,187.25 55.25,187.25 55.25,191.75 42.25,191.75 42.25,197.25 55.25,197.25 55.25,201.75 42.25,201.75 42.25,207.25 55.25,207.25 55.25,211.75 42.25,211.75 42.25,217.5 40.5,217.5
  region: 57.5,217.5 42.75,217.5 42.75,212.25 55.75,212.25 55.75,206.75 42.75,206.75 42.75,202.25 55.75,202.25 55.75,196.75 42.75,196.75 42.75,192.25 55.75,192.25 55.75,186.75 42.75,186.75 42.75,182.25 55.75,182.25 55.75,176.75 42.75,176.75 42.75,172.25 55.75,172.25 55.75,166.75 42.75,166.75 42.75,162.25 55.75,162.25 55.75,156.75 42.75,156.75 42.75,152.25 55.75,152.25 55.75,146.75 42.75,146.75 42.75,142.25 55.75,142.25 55.75,136.75 42.75,136.75 42.75,132.25 55.75,132.25 55.75,128 57.5,128
  region: 20.5,127.881 35.25,127.881 35.25,131.631 22.25,131.631 22.25,137.131 35.25,137.131 35.25,141.631 22.25,141.631 22.25,147.131 35.25,147.131 35.25,151.631 22.25,151.631 22.25,157.131 35.25,157.131 35.25,161.631 22.25,161.631 22.25,167.131 35.25,167.131 35.25,171.631 22.25,171.631 22.25,177.131 35.25,177.131 35.25,181.631 22.25,181.631 22.25,187.131 35.25,187.131 35.25,191.631 22.25,191.631 22.25,197.131 35.25,197.131 35.25,201.631 22.25,201.631 22.25,207.131 35.25,207.131 35.25,211.631 22.25,211.631 22.25,217.381 20.5,217.381
  region: 37.5,217.381 22.75,217.381 22.75,212.131 35.75,212.131 35.75,206.631 22.75,206.631 22.75,202.131 35.75,202.131 35.75,196.631 22.75,196.631 22.75,192.131 35.75,192.131 35.75,186.631 22.75,186.631 22.75,182.131 35.75,182.131 35.75,176.631 22.75,176.631 22.75,172.131 35.75,172.131 35.75,166.631 22.75,166.631 22.75,162.131 35.75,162.131 35.75,156.631 22.75,156.631 22.75,152.131 35.75,152.131 35.75,146.631 22.75,146.631 22.75,142.131 35.75,142.131 35.75,136.631 22.75,136.631 22.75,132.131 35.75,132.131 35.75,127.881 37.5,127.881
  region net MES: 17.5,217.381 2.75,217.381 2.75,212.131 15.75,212.131 15.75,206.631 2.75,206.631 2.75,202.131 15.75,202.131 15.75,196.631 2.75,196.631 2.75,192.131 15.75,192.131 15.75,186.631 2.75,186.631 2.75,182.131 15.75,182.131 15.75,176.631 2.75,176.631 2.75,172.131 15.75,172.131 15.75,166.631 2.75,166.631 2.75,162.131 15.75,162.131 15.75,156.631 2.75,156.631 2.75,152.131 15.75,152.131 15.75,146.631 2.75,146.631 2.75,142.131 15.75,142.131 15.75,136.631 2.75,136.631 2.75,132.131 15.75,132.131 15.75,127.881 17.5,127.881
  region net GND_ESD: 0.5,127.881 15.25,127.881 15.25,131.631 2.25,131.631 2.25,137.131 15.25,137.131 15.25,141.631 2.25,141.631 2.25,147.131 15.25,147.131 15.25,151.631 2.25,151.631 2.25,157.131 15.25,157.131 15.25,161.631 2.25,161.631 2.25,167.131 15.25,167.131 15.25,171.631 2.25,171.631 2.25,177.131 15.25,177.131 15.25,181.631 2.25,181.631 2.25,187.131 15.25,187.131 15.25,191.631 2.25,191.631 2.25,197.131 15.25,197.131 15.25,201.631 2.25,201.631 2.25,207.131 15.25,207.131 15.25,211.631 2.25,211.631 2.25,217.381 0.5,217.381
  text "kerteszsasa" at 41,218.619 h0.5 r90
  text "kerteszsasa" at 1,218.5 h0.5 r90
  text "kerteszsasa" at 21,218.5 h0.5 r90
  text "kerteszsasa" at 61,218.5 h0.5 r90
  text "kerteszsasa" at 81,218.5 h0.5 r90
Bottom Layer:
  region: 80.5,127.881 95.25,127.881 95.25,131.631 82.25,131.631 82.25,137.131 95.25,137.131 95.25,141.631 82.25,141.631 82.25,147.131 95.25,147.131 95.25,151.631 82.25,151.631 82.25,157.131 95.25,157.131 95.25,161.631 82.25,161.631 82.25,167.131 95.25,167.131 95.25,171.631 82.25,171.631 82.25,177.131 95.25,177.131 95.25,181.631 82.25,181.631 82.25,187.131 95.25,187.131 95.25,191.631 82.25,191.631 82.25,197.131 95.25,197.131 95.25,201.631 82.25,201.631 82.25,207.131 95.25,207.131 95.25,211.631 82.25,211.631 82.25,217.381 80.5,217.381
  region: 97.5,217.381 82.75,217.381 82.75,212.131 95.75,212.131 95.75,206.631 82.75,206.631 82.75,202.131 95.75,202.131 95.75,196.631 82.75,196.631 82.75,192.131 95.75,192.131 95.75,186.631 82.75,186.631 82.75,182.131 95.75,182.131 95.75,176.631 82.75,176.631 82.75,172.131 95.75,172.131 95.75,166.631 82.75,166.631 82.75,162.131 95.75,162.131 95.75,156.631 82.75,156.631 82.75,152.131 95.75,152.131 95.75,146.631 82.75,146.631 82.75,142.131 95.75,142.131 95.75,136.631 82.75,136.631 82.75,132.131 95.75,132.131 95.75,127.881 97.5,127.881
  region: 60.5,127.881 75.25,127.881 75.25,131.631 62.25,131.631 62.25,137.131 75.25,137.131 75.25,141.631 62.25,141.631 62.25,147.131 75.25,147.131 75.25,151.631 62.25,151.631 62.25,157.131 75.25,157.131 75.25,161.631 62.25,161.631 62.25,167.131 75.25,167.131 75.25,171.631 62.25,171.631 62.25,177.131 75.25,177.131 75.25,181.631 62.25,181.631 62.25,187.131 75.25,187.131 75.25,191.631 62.25,191.631 62.25,197.131 75.25,197.131 75.25,201.631 62.25,201.631 62.25,207.131 75.25,207.131 75.25,211.631 62.25,211.631 62.25,217.381 60.5,217.381
  region: 77.5,217.381 62.75,217.381 62.75,212.131 75.75,212.131 75.75,206.631 62.75,206.631 62.75,202.131 75.75,202.131 75.75,196.631 62.75,196.631 62.75,192.131 75.75,192.131 75.75,186.631 62.75,186.631 62.75,182.131 75.75,182.131 75.75,176.631 62.75,176.631 62.75,172.131 75.75,172.131 75.75,166.631 62.75,166.631 62.75,162.131 75.75,162.131 75.75,156.631 62.75,156.631 62.75,152.131 75.75,152.131 75.75,146.631 62.75,146.631 62.75,142.131 75.75,142.131 75.75,136.631 62.75,136.631 62.75,132.131 75.75,132.131 75.75,127.881 77.5,127.881
  region: 40.5,128 55.25,128 55.25,131.75 42.25,131.75 42.25,137.25 55.25,137.25 55.25,141.75 42.25,141.75 42.25,147.25 55.25,147.25 55.25,151.75 42.25,151.75 42.25,157.25 55.25,157.25 55.25,161.75 42.25,161.75 42.25,167.25 55.25,167.25 55.25,171.75 42.25,171.75 42.25,177.25 55.25,177.25 55.25,181.75 42.25,181.75 42.25,187.25 55.25,187.25 55.25,191.75 42.25,191.75 42.25,197.25 55.25,197.25 55.25,201.75 42.25,201.75 42.25,207.25 55.25,207.25 55.25,211.75 42.25,211.75 42.25,217.5 40.5,217.5
  region: 57.5,217.5 42.75,217.5 42.75,212.25 55.75,212.25 55.75,206.75 42.75,206.75 42.75,202.25 55.75,202.25 55.75,196.75 42.75,196.75 42.75,192.25 55.75,192.25 55.75,186.75 42.75,186.75 42.75,182.25 55.75,182.25 55.75,176.75 42.75,176.75 42.75,172.25 55.75,172.25 55.75,166.75 42.75,166.75 42.75,162.25 55.75,162.25 55.75,156.75 42.75,156.75 42.75,152.25 55.75,152.25 55.75,146.75 42.75,146.75 42.75,142.25 55.75,142.25 55.75,136.75 42.75,136.75 42.75,132.25 55.75,132.25 55.75,128 57.5,128
  region: 20.5,127.881 35.25,127.881 35.25,131.631 22.25,131.631 22.25,137.131 35.25,137.131 35.25,141.631 22.25,141.631 22.25,147.131 35.25,147.131 35.25,151.631 22.25,151.631 22.25,157.131 35.25,157.131 35.25,161.631 22.25,161.631 22.25,167.131 35.25,167.131 35.25,171.631 22.25,171.631 22.25,177.131 35.25,177.131 35.25,181.631 22.25,181.631 22.25,187.131 35.25,187.131 35.25,191.631 22.25,191.631 22.25,197.131 35.25,197.131 35.25,201.631 22.25,201.631 22.25,207.131 35.25,207.131 35.25,211.631 22.25,211.631 22.25,217.381 20.5,217.381
  region: 37.5,217.381 22.75,217.381 22.75,212.131 35.75,212.131 35.75,206.631 22.75,206.631 22.75,202.131 35.75,202.131 35.75,196.631 22.75,196.631 22.75,192.131 35.75,192.131 35.75,186.631 22.75,186.631 22.75,182.131 35.75,182.131 35.75,176.631 22.75,176.631 22.75,172.131 35.75,172.131 35.75,166.631 22.75,166.631 22.75,162.131 35.75,162.131 35.75,156.631 22.75,156.631 22.75,152.131 35.75,152.131 35.75,146.631 22.75,146.631 22.75,142.131 35.75,142.131 35.75,136.631 22.75,136.631 22.75,132.131 35.75,132.131 35.75,127.881 37.5,127.881
  region net MES: 17.5,217.381 2.75,217.381 2.75,212.131 15.75,212.131 15.75,206.631 2.75,206.631 2.75,202.131 15.75,202.131 15.75,196.631 2.75,196.631 2.75,192.131 15.75,192.131 15.75,186.631 2.75,186.631 2.75,182.131 15.75,182.131 15.75,176.631 2.75,176.631 2.75,172.131 15.75,172.131 15.75,166.631 2.75,166.631 2.75,162.131 15.75,162.131 15.75,156.631 2.75,156.631 2.75,152.131 15.75,152.131 15.75,146.631 2.75,146.631 2.75,142.131 15.75,142.131 15.75,136.631 2.75,136.631 2.75,132.131 15.75,132.131 15.75,127.881 17.5,127.881
  region net GND_ESD: 0.5,127.881 15.25,127.881 15.25,131.631 2.25,131.631 2.25,137.131 15.25,137.131 15.25,141.631 2.25,141.631 2.25,147.131 15.25,147.131 15.25,151.631 2.25,151.631 2.25,157.131 15.25,157.131 15.25,161.631 2.25,161.631 2.25,167.131 15.25,167.131 15.25,171.631 2.25,171.631 2.25,177.131 15.25,177.131 15.25,181.631 2.25,181.631 2.25,187.131 15.25,187.131 15.25,191.631 2.25,191.631 2.25,197.131 15.25,197.131 15.25,201.631 2.25,201.631 2.25,207.131 15.25,207.131 15.25,211.631 2.25,211.631 2.25,217.381 0.5,217.381

## Silkscreen, mask and mechanical layers (free items; w line width, h text height)
Bottom Overlay:
  text "out gnd 5V" at 52.5,226.519 h0.7
  text "out gnd 5V" at 12.5,226.4 h0.7
  text "out gnd 5V" at 32.5,226.4 h0.7
  text "out gnd 5V" at 72.5,226.4 h0.7
  text "out gnd 5V" at 92.5,226.4 h0.7